# Altium PCB PCBVer4.PcbDoc
Units mm, origin at the board's own origin, x right, y up, seen from the top; angles counter-clockwise.
Board outline 40 x 13 mm, 6 copper layers (Top Signal Layer, GND_1, PWR, Mid Signal Layer, GND_2, Bottom Signal Layer), stack 1.244 mm thick; 68 components, 58 nets, 322 pads, 77 vias.
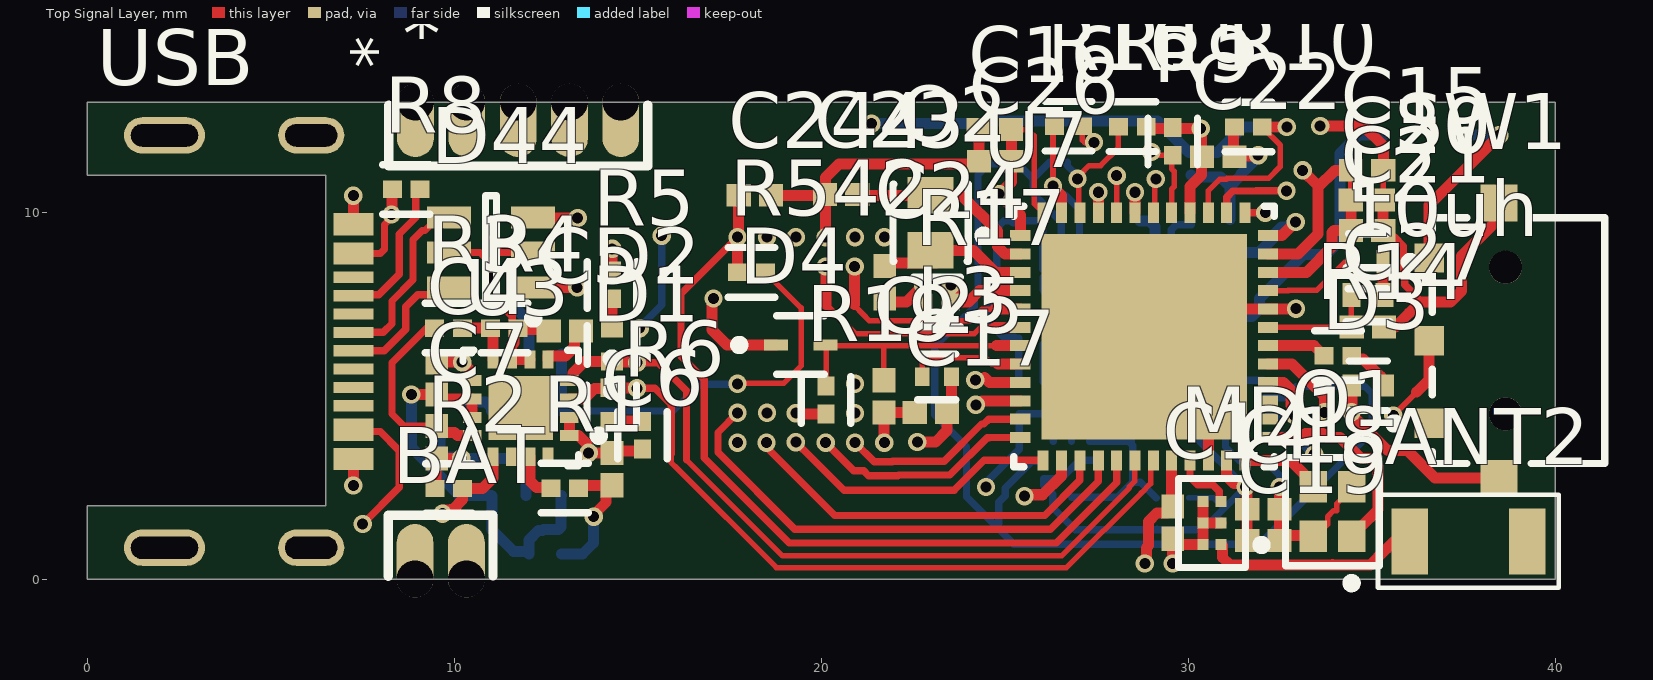
[diagram p0: Top Signal Layer view]
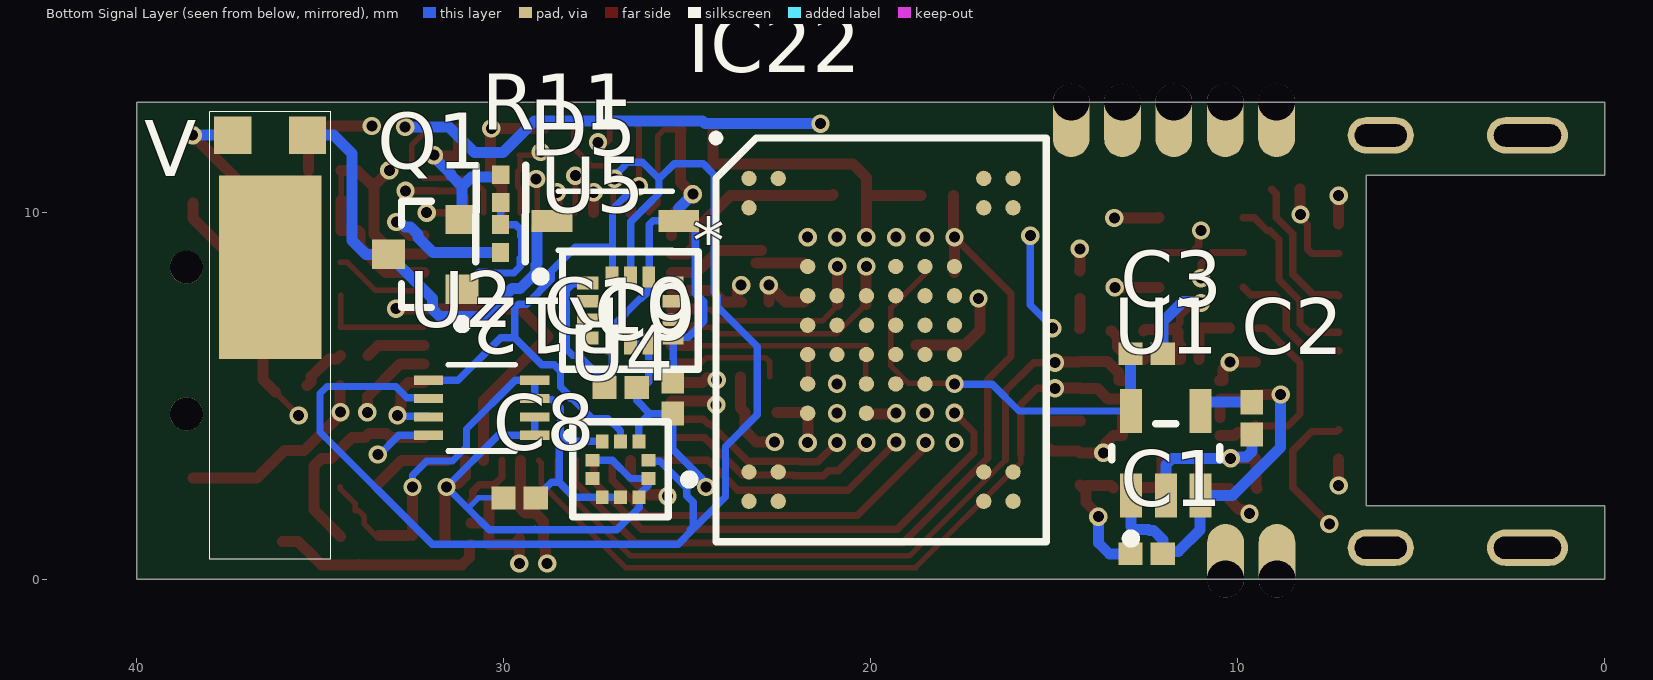
[diagram p1: Bottom Signal Layer view, seen from below]
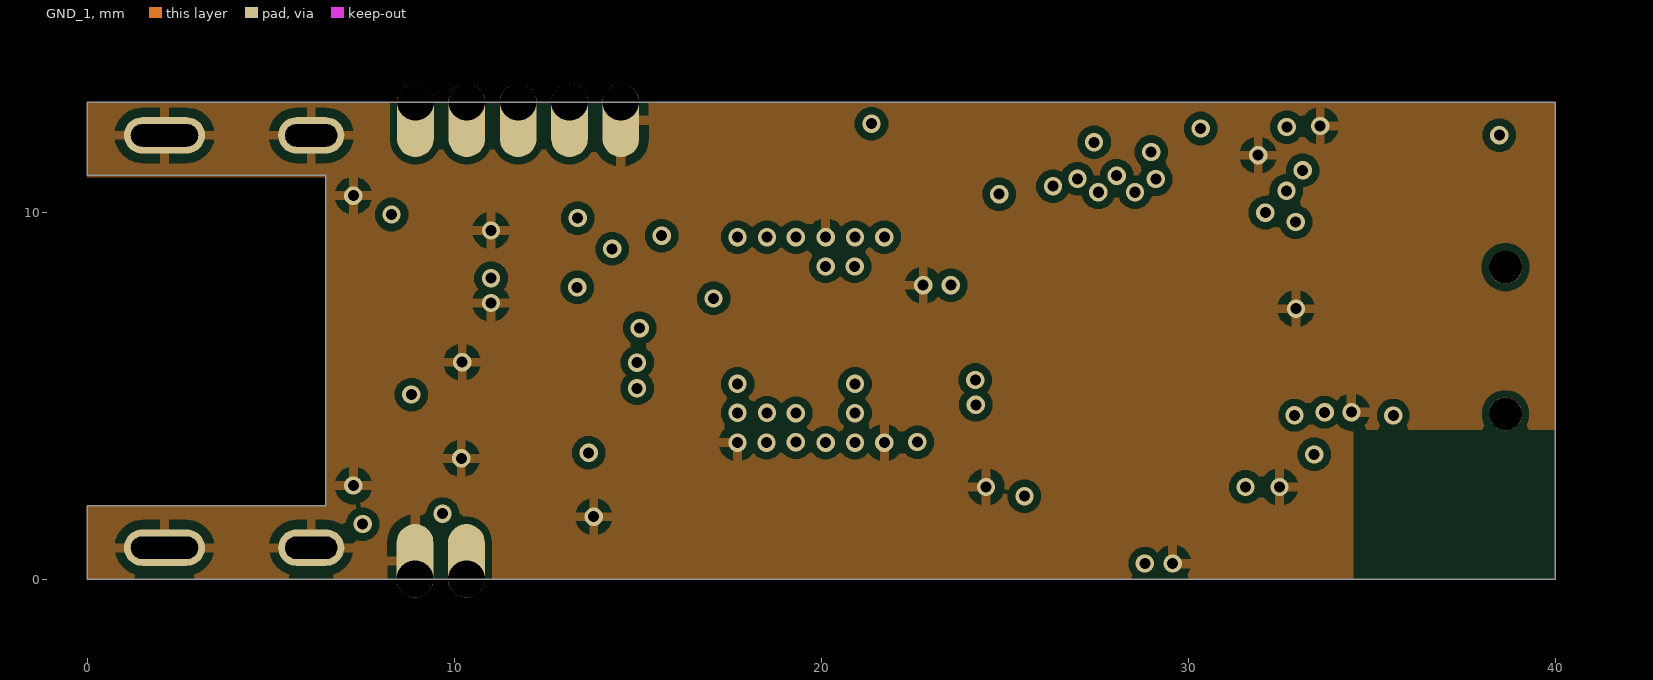
[diagram p2: GND_1]
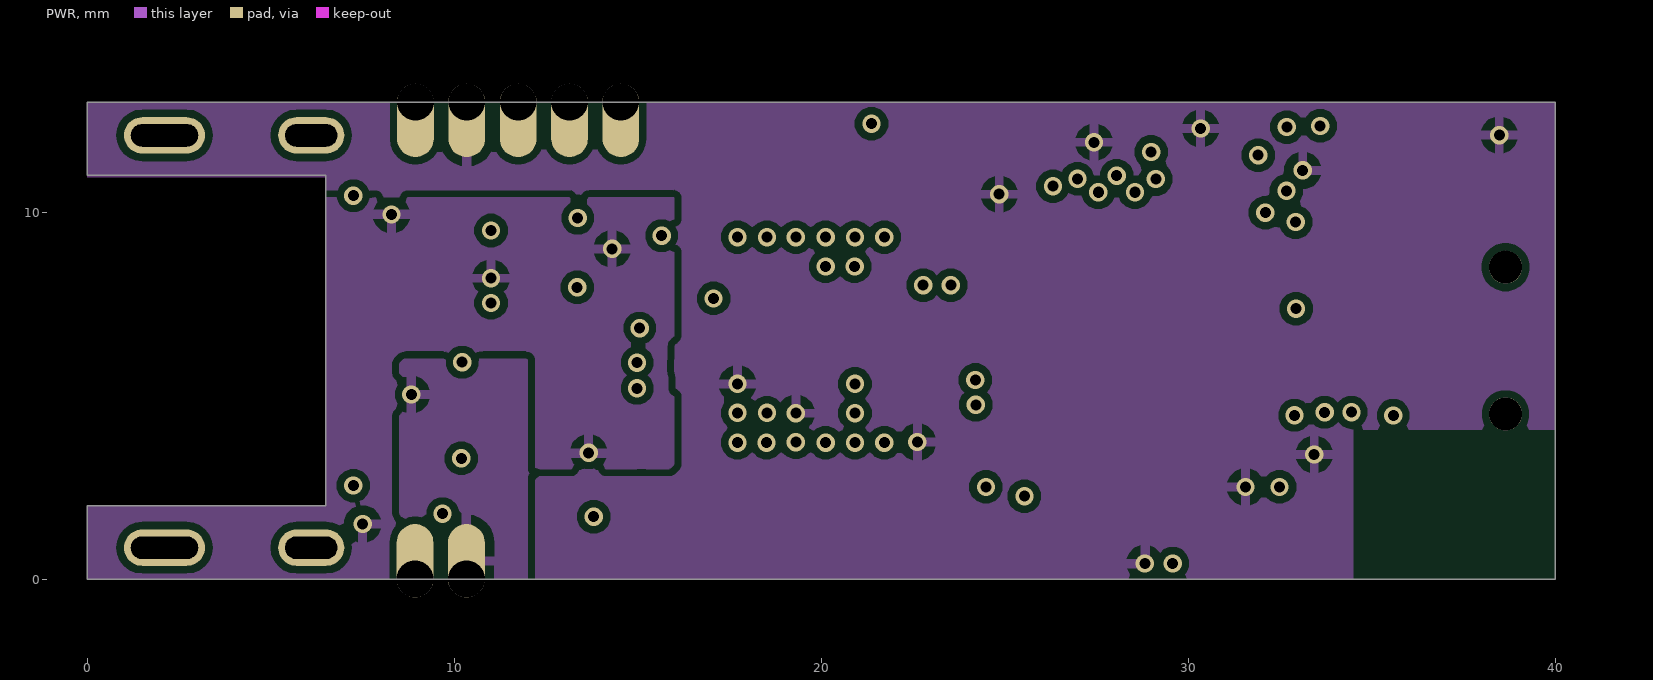
[diagram p3: PWR]
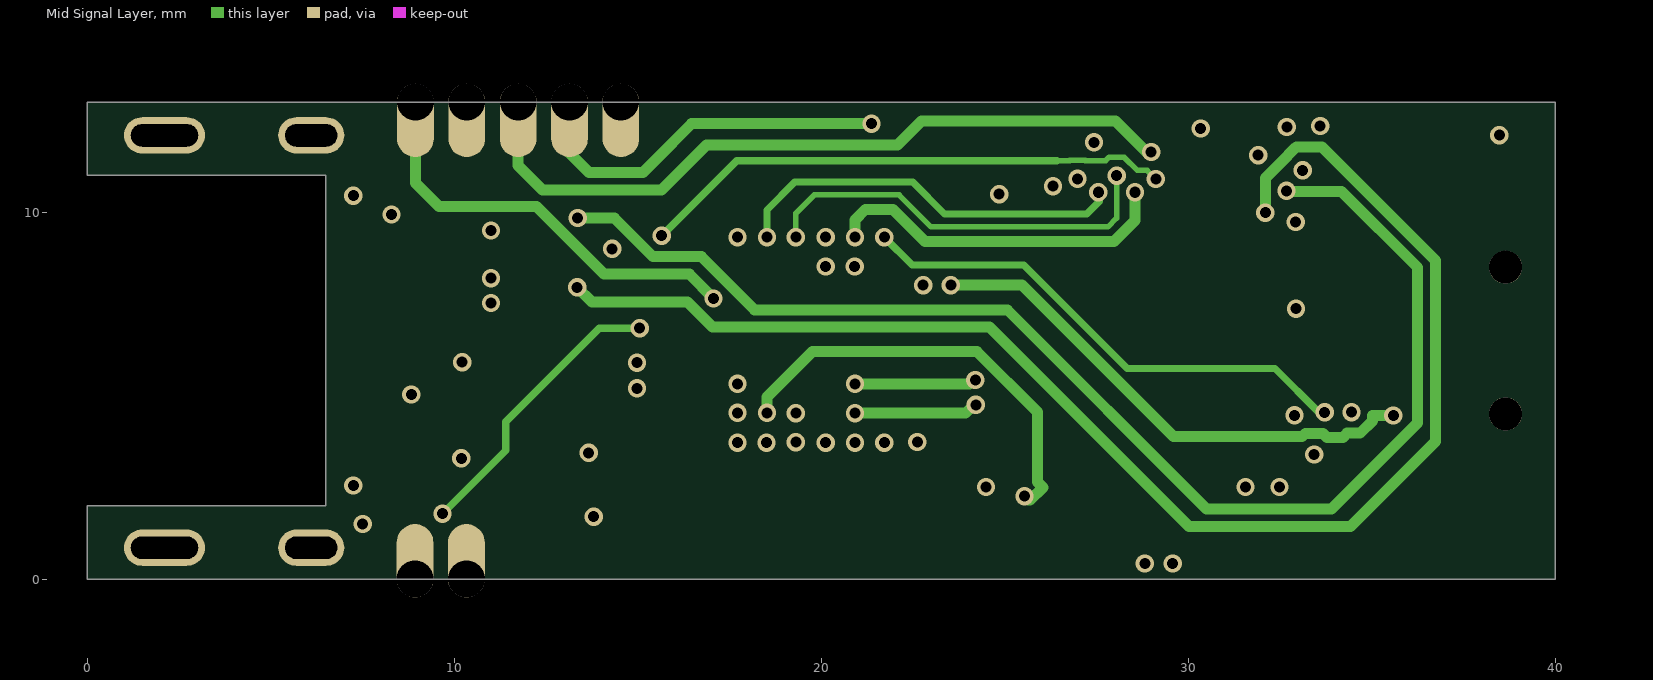
[diagram p4: Mid Signal Layer]
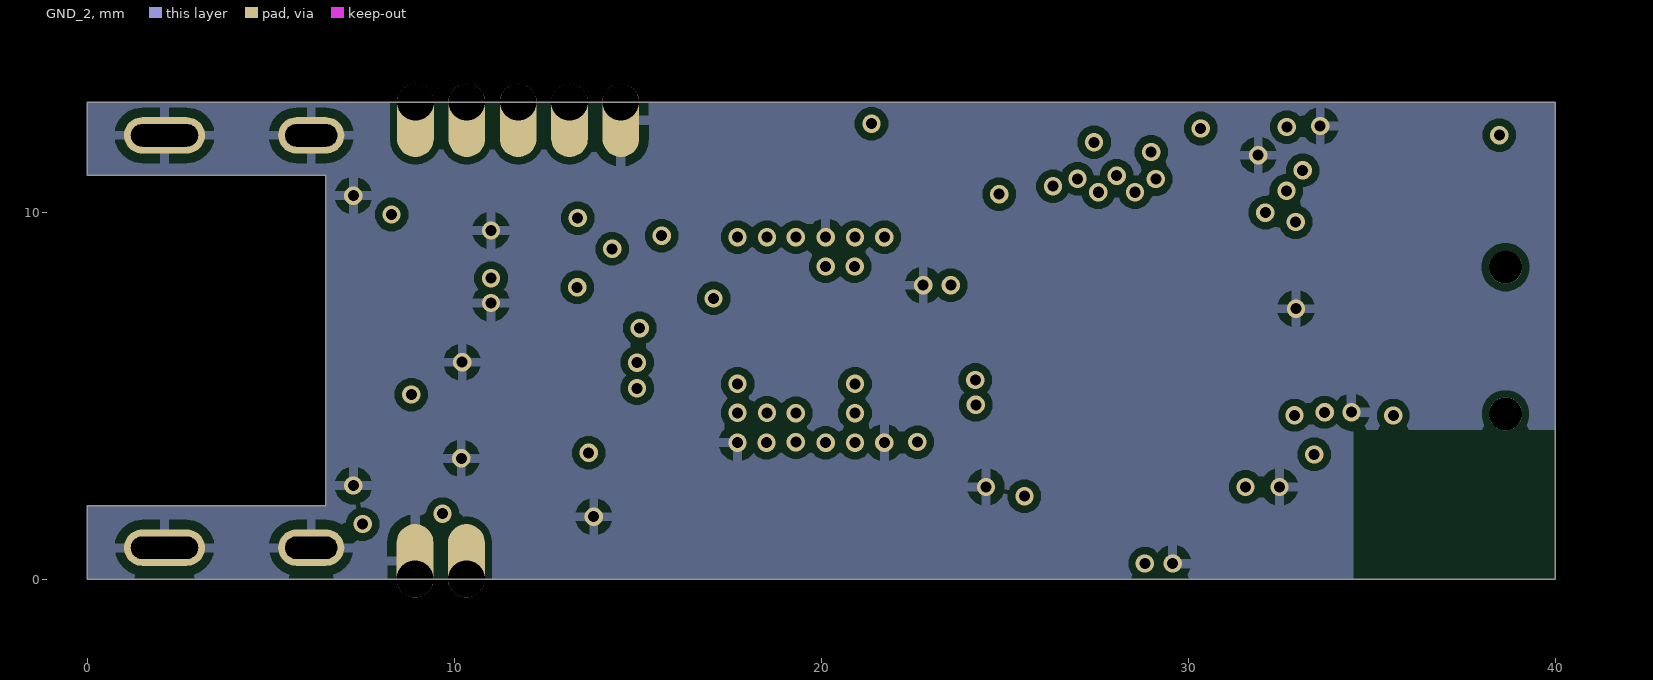
[diagram p5: GND_2]
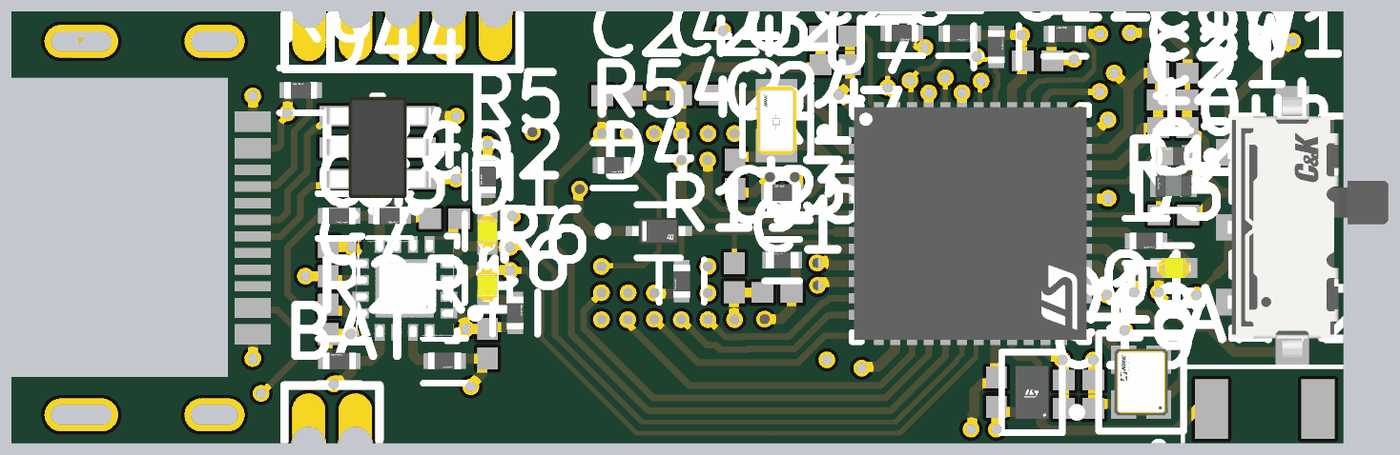
[diagram p6: 3D render of the assembled board from above, using the file's embedded part models]

## Layer stack, top to bottom
Top Solder: solder mask 0.0102, Solder Resist, Dk 3.5
Top Signal Layer: signal copper 0.018
Dielectric 2: prepreg 0.125, PP-006, Dk 4.1
GND_1: signal copper 0.035
Dielectric 4: prepreg 0.0711, PP-006, Dk 4.1
PWR: signal copper 0.018
Dielectric 1: dielectric 0.71, FR-4, Dk 4.8
Mid Signal Layer: signal copper 0.018
Dielectric 5: prepreg 0.0711, PP-006, Dk 4.1
GND_2: signal copper 0.035
Dielectric 3: prepreg 0.125, PP-006, Dk 4.1
Bottom Signal Layer: signal copper 0.018
Bottom Solder: solder mask 0.0102, Solder Resist, Dk 3.5

## Board outline
0,11 6.5,11 6.5,2 0,2 0,0 40,0 40,13 0,13

## Design rules (kind name [scope] priority, off if disabled: settings)
Clearance [All] p1: gap=0.2 ignorepadtopadclearanceinfootprint=FALSE except(0.175: Arc-Arc Arc-Track Arc-Via Arc-Hole Track-Track Track-Via Track-Hole Via-Via Via-Hole)
PolygonConnect [All] p1: connectstyle=Relief reliefconductorwidth=0.254 reliefentries=4 polygonreliefangle="90 Angle" airgapwidth=0.254
RoutingVias [All] p1: holewidth=0.3 width=0.5 viastyle="Through Hole" minholewidth=0.3 minwidth=0.5 maxholewidth=0.3 maxwidth=0.5
SolderMaskExpansion [All] p1: expansion=0.102 istentingtop=FALSE
Width [All] p1: maxlimit=0.3 minlimit=0.15 preferedwidth=0.2 minimp=50.000000 maximp=50.000000 favimp=50.000000
30 further rules are at their usual default settings.

## Classes and differential pairs
component class U_VIBRO: D5 Q1 R11 R12 V
component class U_USB: D44 R8 USB
component class U_TC58BVG1S3HBAI4: C244 IC22 R542
component class U_SWD: * R9 R10
component class U_STM32WB55CGU6: 10uh ANT2 C14 C15 C16 C17 C18 C19 C20 C21 C22 C23 C24 C25 C26 C27 D3 D4 L2 L3 MD1 O1 O2 R14 R15 R16 R17 R19 SW1 U7
component class U_M24512-DFMC6TG: U2
component class U_LSM6DSRXTR: C9 C10 U5
component class U_LPS22HBTR: C8 U4
component class U_LD3985M33R: C1 C2 C3 U1
component class U_L6924D013TR: BAT C4 C5 C6 C7 D1 D2 R1 R2 R3 R4 R5 R6 U3

## Components (designator, comment, footprint, x,y, rotation, side; value= is the part's Value field where it differs from the comment)
10uh "L1" FP-LQW15DN_00-MFG 34.9,7.74 r180 top
* "SWD" PCBComponent_1 15.54,9 r180 top
ANT2 "KH3216-A55" KH3216-A55 37.69,1.03 r270 top
BAT "BAT-CON" BAT-CON 9.653,0.568 r0 top
C1 "10 uF" CAPC1005X55X25NL05T10 12.48,0.69 r180 bottom
C2 "10 nF" CAPC1005X55X25NL05T10 9.62,4.38 r90 bottom
C3 "1 uF" CAPC1005X55X25NL05T10 12.48,6.14 r0 bottom
C4 "1 uF" CAPC1005X55X25NL05T10 9.52,5.47 r270 top
C5 "330 pF" CAPC1005X55X25NL05T10 13.011,6.76 r180 top
C6 "1 uF" CAPC1005X55X25NL05T10 14.3,3 r270 top
C7 "1 uF" CAPC1005X55X25NL05T10 9.52,3.73 r90 top
C8 "4.7 uF" CAPC1005X55X25NL05T10 29.57,2.21 r0 bottom
C9 "100 nF" CAPC1005X55X25NL05T10 26.82,5.22 r0 bottom
C10 "100 nF" CAPC1005X55X25NL05T10 25.4,4.95 r90 bottom
C14 "100 nF" CAPC1005X55X25NL05T10 29.58,1.54 r270 top
C15 "100 nF" CAPC1005X55X25NL05T10 34.88,11.14 r180 top
C16 "100 nF" CAPC1005X55X25NL05T10 24.73,12.25 r180 top
C17 "100 nF" CAPC1005X55X25NL05T10 22.99,4.54 r0 top
C18 "100 nF" CAPC1005X55X25NL05T10 32.05,1.9 r0 top
C19 "100 pF" CAPC1005X55X25NL05T10 32.05,1.05 r180 top
C20 "4.7 uF" CAPC1005X55X25NL05T10 34.87,10.33 r180 top
C21 "100 nF" CAPC1005X55X25NL05T10 34.88,9.5 r0 top
C22 "100 nF" CAPC1005X55X25NL05T10 30.82,11.51 r180 top
C23 "4.3 pF" CAPC1005X55X25NL05T10 20.54,10.48 r180 top
C24 "4.3 pF" CAPC1005X55X25NL05T10 21.73,8.09 r90 top
C25 "100 nF" CAPC1005X55X25NL05T10 21.71,4.98 r90 top
C26 "100 nF" CAPC1005X55X25NL05T10 24.74,11.39 r0 top
C27 "4.7 uF" CAPC1005X55X25NL05T10 34.9,6.87 r0 top
C244 "?nf" CAPC1005X55X25NL05T10 18.19,10.46 r180 top
D1 "LED" FP-SML-P11MTT86-MFG 14.29,4.76 r270 top
D2 "LED" FP-SML-P11MTT86-MFG 14.3,6.38 r90 top
D3 "LED" FP-SML-P11MTT86-MFG 34.91,5.27 r0 top
D4 "BAT54KFILM" FP-SOD-523-MFG 19.44,6.38 r0 top value=7pF
D5 "BAT43W-7-F" BAT43W-7-F 26.91,9.79 r0 bottom
D44 "USBLC6-2SC6" STM-SOT23-6L_V 11,8.9 r180 top
IC22 "TC58BVG1S3HBAI4" BGA63C80P10X12_900X1100X100 19.72,6.52 r180 bottom
L2 "10nh" FP-LQG15WH_02-MFG 34.89,8.64 r180 top
L3 "FBH1005-601Y" FP-BLM15-0_05-MFG 23.15,5.51 r180 top
MD1 "MLPF-WB55-01E3" FP-MLPF-WB55-01E3-MFG 30.65,1.53 r180 top
O1 "NX2016SA-32MHZ" FP-NX2016SA-MFG 33.93,1.84 r90 top
O2 "NX2012SA-32.768K" FP-NX2012SA-MFG 22.98,9.71 r270 top
Q1 "DMG3420U-7" DIOD-SOT23-3_B_V 32.14,8.85 r0 bottom
R1 "130 Kohm" FP-RC1005-IPC_C 13.01,2.48 r0 top
R2 "3.3 Kohm" FP-RC1005-IPC_C 9.85,2.47 r180 top
R3 "1 Kohm" FP-RC1005-IPC_C 9.841,6.84 r0 top
R4 "470 ohm" FP-RC1005-IPC_C 11.361,6.84 r0 top
R5 "680 Om" FP-RC1005-IPC_C 14.3,8.02 r270 top
R6 "680 Om" FP-RC1005-IPC_C 15.13,3.92 r90 top
R8 "5.3 Kohm" FP-RC1005-IPC_C 8.69,10.62 r180 top
R9 "10 Kohm" FP-RC1005-IPC_C 29.58,11.93 r90 top
R10 "10 Kohm" FP-RC1005-IPC_C 31.64,12.32 r180 top
R11 "100 Kohm" FP-RC1005-IPC_C 30.08,10.64 r90 bottom
R12 "100 ohm" FP-RC1005-IPC_C 30.09,9.28 r270 bottom
R14 "0 ohm" FP-RC1005-IPC_C 34.08,6.09 r0 top
R15 "1.8 Kohm" FP-RC1005-IPC_C 28.48,12.33 r0 top
R16 "1.8 Kohm" FP-RC1005-IPC_C 26.74,12.34 r0 top
R17 "10Kohm" FP-RC1005-IPC_C 23.15,7.55 r180 top
R19 "100 Kohm" FP-RC1005-IPC_C 20.13,4.88 r270 top
R542 "? Kohm" FP-RC1005-IPC_C 18.1,8.36 r0 top
SW1 "JS102000SAQN" FP-JS102000SAQN-MFG 39,6.5 r90 top
U1 "LD3985M33R" FP-SOT23-5L-7049676-MFG 11.96,3.43 r90 bottom
U2 "M24512-DFMC6TG" M24512-DFMC6TG 30.63,4.77 r0 bottom
U3 "L6924D013TR" FP-VFQFPN16-7185330-MFG 11.81,4.66 r180 top
U4 "LPS22HBTR" FP-HLGA-10L-8479831-0 26.82,2.99 r0 bottom
U5 "LSM6DSRXTR" FP-LGA-14L-DM00249496-MFG 26.55,7.32 r180 bottom
U7 "STM32WB55CGU6" FP-STM32WB55CGU6-MFG 28.8,6.61 r0 top
USB "USB4510-03-1-A" USB4510-03-1-A 3.3,6.5 r270 top
V "VIBRO" VIBRO 36.37,12.1 r180 bottom

## Footprints (in the part's own frame and the unit in brackets; to place one, negate y for a bottom-side part, rotate by r counter-clockwise, add the part's x,y. Pads: shape width x height; smd on the part's side, far side on the other; paste and mask are expansions set on the pad)
BAT43W-7-F [mil]
  rect 43.75x23.65 smd paste+0 mask+0: 1(-65.91,1) 2(69.91,1)
  silkscreen extent -59,-31 63,33
BAT-CON [mm]
  oval 1x2 hole 1 copper offset 0,0.5: 1(-0.723,-0.568) 2(0.677,-0.568)
  silkscreen extent -1.45,-0.49 1.4,1.17
BGA63C80P10X12_900X1100X100 [mm]
  round 0.418 smd: A1(-3.6,4.4) A2(-2.8,4.4) A9(2.8,4.4) A10(3.6,4.4) B1(-3.6,3.6) B9(2.8,3.6) B10(3.6,3.6) C3(-2,2.8) C4(-1.2,2.8) C5(-0.4,2.8) C6(0.4,2.8) C7(1.2,2.8) C8(2,2.8) D3(-2,2) D4(-1.2,2) D5(-0.4,2) D6(0.4,2) D7(1.2,2) D8(2,2) E3(-2,1.2) E4(-1.2,1.2) E5(-0.4,1.2) E6(0.4,1.2) E7(1.2,1.2) E8(2,1.2) F3(-2,0.4) F4(-1.2,0.4) F5(-0.4,0.4) F6(0.4,0.4) F7(1.2,0.4) F8(2,0.4) G3(-2,-0.4) G4(-1.2,-0.4) G5(-0.4,-0.4) G6(0.4,-0.4) G7(1.2,-0.4) G8(2,-0.4) H3(-2,-1.2) H4(-1.2,-1.2) H5(-0.4,-1.2) H6(0.4,-1.2) H7(1.2,-1.2) H8(2,-1.2) J3(-2,-2) J4(-1.2,-2) J5(-0.4,-2) J6(0.4,-2) J7(1.2,-2) J8(2,-2) K3(-2,-2.8) K4(-1.2,-2.8) K5(-0.4,-2.8) K6(0.4,-2.8) K7(1.2,-2.8) K8(2,-2.8) L1(-3.6,-3.6) L2(-2.8,-3.6) L9(2.8,-3.6) L10(3.6,-3.6) M1(-3.6,-4.4) M2(-2.8,-4.4) M9(2.8,-4.4) M10(3.6,-4.4)
  silkscreen extent -4.6,-5.5 4.5,5.6, body extent -4.5,-5.5 4.5,5.5, height 1
CAPC1005X55X25NL05T10 [mm] "Chip Capacitor, 2-Leads, Body 1.00x0.50mm, IPC Medium Density"
  rect 0.66x0.62 smd: 1(-0.44,0) 2(0.44,0)
  body extent -0.53,-0.28 0.53,0.27, height 0.55
DIOD-SOT23-3_B_V [mm] "SOT23, 3-Leads, Body 2.9x1.3mm, Pitch 0.95mm"
  rect 0.9x0.8 smd: 1(-1,0.95) 2(-1,-0.95) 3(1,0)
  silkscreen extent -1.12,-1.45 0.65,2.02, body extent -0.65,-1.45 0.65,1.45, height 1.17
FP-BLM15-0_05-MFG [mm]
  rect 0.4x0.5 smd paste+0 mask+0: 1(-0.4,0) 2(0.4,0)
  silkscreen extent -0.53,-0.63 0.52,0.63, body extent -0.7,-0.38 0.7,0.38, height 0.25
FP-HLGA-10L-8479831-0 [mm]
  rect 0.375x0.35 smd paste+0 mask+0: 1(-0.763,0.25) 2(-0.763,-0.25) 6(0.763,-0.25) 7(0.763,0.25)
  rect 0.35x0.375 smd paste+0 mask+0: 3(-0.5,-0.763) 4(0,-0.763) 5(0.5,-0.763) 8(0.5,0.763) 9(0,0.763) 10(-0.5,0.763)
  silkscreen extent -2,-1.3 1.3,1.3, body extent -1,-1 1,1, height 0.8
FP-JS102000SAQN-MFG [mm]
  rect 0.8x0.8 smd paste+0 mask+0: 1(-2.25,2.43) 2(0,2.43) 3(2.25,2.43)
  rect 1x1 smd paste+0 mask+0: 4(-3.75,0.53) 5(3.75,0.53)
  round 0.9 hole 0.9 unplated paste-2539.97 mask+0: ""(-2,0.35) ""(2,0.35)
  silkscreen extent -3.35,-2.35 3.35,3.5, body extent -4.35,-2.45 4.35,2.93, height 0.25
FP-LGA-14L-DM00249496-MFG [mm]
  rect 0.575x0.35 smd paste-1000 mask+0: 1(-1.162,0.75) 2(-1.162,0.25) 3(-1.162,-0.25) 4(-1.162,-0.75) 8(1.162,-0.75) 9(1.162,-0.25) 10(1.162,0.25) 11(1.162,0.75)
  rect 0.35x0.575 smd paste-1000 mask+0: 5(-0.5,-0.913) 6(0,-0.913) 7(0.5,-0.913) 12(0.5,0.913) 13(0,0.913) 14(-0.5,0.913)
  silkscreen extent -2.58,-1.6 1.85,1.6, body extent -1.5,-1.25 1.5,1.25, height 0.86
FP-LQG15WH_02-MFG [mm]
  rect 0.35x0.65 smd paste+0 mask+0: 1(-0.425,0) 2(0.425,0)
  silkscreen extent -1.28,-0.78 0.53,0.72, body extent -0.7,-0.43 0.7,0.43, height 0.25
FP-LQW15DN_00-MFG [mm]
  rect 0.5x0.66 smd paste+0 mask+0: 1(-0.45,0) 2(0.45,0)
  silkscreen extent -0.6,-0.74 0.6,0.72, body extent -0.8,-0.48 0.8,0.48, height 0.25
FP-MLPF-WB55-01E3-MFG [mm]
  rect 0.3x0.3 smd paste-1000 mask-1000: A1(-0.25,0.587) A2(-0.25,0) A3(-0.25,-0.587) B1(0.25,0.587) B2(0.25,0) B3(0.25,-0.587)
  silkscreen extent -1.48,-1.21 0.91,1.21, body extent -1.01,-1.31 1.01,1.31, height 0.25
FP-NX2012SA-MFG [mm]
  rect 1x1.25 smd paste+0 mask+0: 1(-0.75,0) 2(0.75,0)
  silkscreen extent -1.05,-1.02 1.05,1.02, body extent -1.35,-0.72 1.35,0.72, height 0.25
FP-NX2016SA-MFG [mm]
  rect 0.85x0.75 smd paste+0 mask+0: 1(-0.675,-0.525) 2(0.675,-0.525) 3(0.675,0.525) 4(-0.675,0.525)
  silkscreen extent -2.07,-1.28 1.48,1.28, body extent -1.2,-1 1.2,1, height 0.25
FP-RC1005-IPC_C [mm]
  rect 0.515x0.472 smd paste+0 mask+0: 1(-0.379,0) 2(0.379,0)
  silkscreen extent -0.64,-0.67 0.64,0.67, body extent -0.74,-0.38 0.74,0.38, height 0.25
FP-SML-P11MTT86-MFG [mm]
  rect 0.5x0.6 smd paste+0 mask+0: 1(-0.45,0) 2(0.45,0)
  silkscreen extent -1.37,-0.67 0.53,0.67, body extent -0.8,-0.43 0.8,0.43, height 0.25
FP-SOD-523-MFG [mm]
  rect 0.65x0.3 smd paste+0 mask+0: 1(-0.675,0) 2(0.675,0)
  silkscreen extent -1.8,-0.8 0.65,0.8, body extent -1.1,-0.55 1.1,0.55, height 0.25
FP-SOT23-5L-7049676-MFG [mm]
  rect 1.2x0.6 smd paste+0 mask+0: 1(-1.15,0.95) 2(-1.15,0) 3(-1.15,-0.95) 4(1.15,-0.95) 5(1.15,0.95)
  silkscreen extent -2.45,-1.48 0.8,1.47, body extent -0.87,-1.5 0.87,1.5, height 1.45
FP-STM32WB55CGU6-MFG [mm]
  rect 0.55x0.3 smd paste+0 mask+0: 1(-3.375,2.75) 2(-3.375,2.25) 3(-3.375,1.75) 4(-3.375,1.25) 5(-3.375,0.75) 6(-3.375,0.25) 7(-3.375,-0.25) 8(-3.375,-0.75) 9(-3.375,-1.25) 10(-3.375,-1.75) 11(-3.375,-2.25) 12(-3.375,-2.75) 25(3.375,-2.75) 26(3.375,-2.25) 27(3.375,-1.75) 28(3.375,-1.25) 29(3.375,-0.75) 30(3.375,-0.25) 31(3.375,0.25) 32(3.375,0.75) 33(3.375,1.25) 34(3.375,1.75) 35(3.375,2.25) 36(3.375,2.75)
  rect 0.3x0.55 smd paste+0 mask+0: 13(-2.75,-3.375) 14(-2.25,-3.375) 15(-1.75,-3.375) 16(-1.25,-3.375) 17(-0.75,-3.375) 18(-0.25,-3.375) 19(0.25,-3.375) 20(0.75,-3.375) 21(1.25,-3.375) 22(1.75,-3.375) 23(2.25,-3.375) 24(2.75,-3.375) 37(2.75,3.375) 38(2.25,3.375) 39(1.75,3.375) 40(1.25,3.375) 41(0.75,3.375) 42(0.25,3.375) 43(-0.25,3.375) 44(-0.75,3.375) 45(-1.25,3.375) 46(-1.75,3.375) 47(-2.25,3.375) 48(-2.75,3.375)
  rect 5.6x5.6 smd paste+0 mask+0: 49(0,0)
  silkscreen extent -4.5,-3.55 3.55,3.55, body extent -3.75,-3.75 3.75,3.75, height 0.25
FP-VFQFPN16-7185330-MFG [mm]
  rect 0.5x0.3 smd paste+0 mask+0: 1(-1.325,0.75) 2(-1.325,0.25) 3(-1.325,-0.25) 4(-1.325,-0.75) 9(1.325,-0.75) 10(1.325,-0.25) 11(1.325,0.25) 12(1.325,0.75)
  rect 0.3x0.5 smd paste+0 mask+0: 5(-0.75,-1.325) 6(-0.25,-1.325) 7(0.25,-1.325) 8(0.75,-1.325) 13(0.75,1.325) 14(0.25,1.325) 15(-0.25,1.325) 16(-0.75,1.325)
  rect 1.75x1.75 smd paste+0 mask+0: 17(0,0)
  silkscreen extent -2.25,-1.58 1.58,1.58, body extent -1.68,-1.68 1.68,1.68, height 0.25
KH3216-A55 [mm]
  rect 1.8x1 smd: 1(0,-1.651) 2(0,1.549)
  silkscreen extent -1.27,-2.51 1.27,2.41
M24512-DFMC6TG [mm]
  rect 0.8x0.25 smd paste+0 mask+0: 1(-1.475,0.852) 2(-1.475,0.352) 3(-1.475,-0.149) 4(-1.475,-0.649) 5(1.424,-0.649) 6(1.424,-0.149) 7(1.424,0.352) 8(1.424,0.852)
  silkscreen extent -2.53,-1.08 0.88,1.28
PCBComponent_1 [mm]
  oval 1x2 hole 1 copper offset 0,0.5: 1(1,-4) 2(2.4,-4) 3(3.8,-4) 4(5.2,-4) 5(6.6,-4)
  silkscreen extent 0.27,-3.92 7.33,-2.26
STM-SOT23-6L_V [mm] "SOT23, 6-Leads, Body 3.05x1.75mm, Pitch 0.95mm"
  rect 1.2x0.6 smd: 1(-1.15,0.95) 2(-1.15,0) 3(-1.15,-0.95) 4(1.15,-0.95) 5(1.15,0) 6(1.15,0.95)
  silkscreen extent -1.28,-1.55 0.15,1.92, body extent -1.6,-1.53 1.6,1.53, height 1.45
USB4510-03-1-A [mil]
  rect 24x43 smd paste+0 mask+0: A1-B12(-125,155.5) A4-B9(-93.5,155.5) B1-A12(127,155.5) B4-A9(95.5,155.5)
  rect 12x43 smd paste+0 mask+0: A5(-48.2,155.5) A6(-8.8,155.5) A7(10.9,155.5) A8(50.3,155.5) B5(70,155.5) B6(30.6,155.5) B7(-28.5,155.5) B8(-68,155.5)
  oval 39x71 hole 24 slot 56 at 90 deg: GND(-220.25,110.25) GND(222.25,110.25)
  oval 39x87 hole 24 slot 72 at 90 deg: GND(-220.25,-47.2) GND(222.25,-47.2)
VIBRO [mil]
  rect 40x40 smd mask+1: 1(40,0) 2(-40,0)
  rect 110.24x196.85 smd: 3(0,-141.73)
  silkscreen extent -65,-455 65,25

## Part data
10uh: library part CMP-06042-016523-1, "FIXED IND 10UH 120MA 5.405OHM", RoHS Compliant=Yes
C1 C2 C3 C4 C5 C6 C7 C8 C9 C10 C14 C15 C16 C17 C18 C19 C20 C21 C22 C23 C24 C25 C26 C27 C244: library part CMP-2008-04515-1, Manufacturer=Murata, Part Number=GRM155F50J684ZE01D
D1 D2 D3: library part CMP-2000-07126-2, "LED YELLOW/GREEN CLEAR 1006 SMD", Case Code (Imperial)=0402, Case Code (Metric)=1005, Color=Green, Forward Current=20mA, Forward Voltage=1.9V, Lens Color=Colorless, Max Operating Temperature=85°C, Min Operating Temperature=-40°C, Package Quantity=1, Power Rating=54mW, Test Current=1mA, Case/Package=0402, Dominant Wavelength=569nm, Height=0.25mm, Illumination Color=Green, Lead Free="Lead Free", Length=1mm, Lens Style=Diffused, Lens Transparency=Clear, Luminous Intensity=2.1mcd, Mount="Surface Mount", Number of LEDs=1, Number of Pins=2, Packaging="Tape and Reel", Radiation Hardening=No, REACH SVHC="No SVHC", RoHS Compliant=Yes, Series=PicoLED™, Viewing Angle=150°, Wavelength=569nm, Width=0.6mm
D4: library part CMP-12187-000026-1, "DIODE SCHOTTKY 40V 300MA SOD523", Capacitance=7pF, Forward Current=300mA, Manufacturer=STMicroelectronics, Max Junction Temp=+150°C, Max Repetitive Reverse Voltage=40V, Max Surge Forward Current=1.25A, Package=SOD-523, Peak Reverse Current=1uA, Temperature="-40°C to +150°C", Temperature Range Low=-40°C, Automotive=No, Category=Diode, ComponentLink2Description=Datasheet, ComponentLink2URL=https://www.st.com/content/ccc/resource/technical/document/datasheet/07/50/54/f2/0d/ba/4a/79/CD00001322.pdf/files/CD00001322.pdf/jcr:content/translations/en.CD00001322.pdf, Device Class L1="Discrete Semiconductors", Device Class L2=Diodes, Device Class L3="Schottky Diodes", Digikey Description="DIODE SCHOTTKY 40V 300MA SOD523", Height=0.7mm, Lead Free=Yes, Manufacturer Part Number=BAT54KFILM, Mouser Description="Schottky Diodes & Rectifiers schottky diode", Octopart=https://octopart.com/bat54kfilm-stmicroelectronics-39618022, RoHS=TRUE, Temperature Range High=+150°C
D44: library part CMP-2000-05378-1, "Very low capacitance ESD protection, 3.5 pF, -40 to 125 degC, 6-Pin SOT23, RoHS, Tape and Reel", Capacitance Value=3.5pF, Clamping Voltage=17V, Leakage Current=0.15uA, Manufacturer=STMicroelectronics, Operating Temp Range=-40Cto125C, Operating Temperature Classification=Automotive, Operating Temperature Max Deg. C=125C, Operating Temperature Min Deg. C=-40C, Package / Case=SOT-23, Package Description="6-Pin Small Outline Transistor, Body 2.925 x 1.625 mm, Pitch 0.95 mm", Package Reference=SOT23-6L, Peak Pulse Current=5A, Reverse Breakdown Voltage=6V, Reverse Stand-off Voltage=5V, Test Current (It)=1mA, Clamping Voltage (Max)=17V, Configuration=Dual, Datasheet URL=http://www.st.com/st-web-ui/static/active/en/resource/technical/document/datasheet/CD00050750.pdf, Datasheet Version="Rev. 5, 10/2011", Direction Type=Uni-Directional, Leakage Current (Max)=0.15uA, Manufacturer URL=http://www.st.com/, Mounting=SurfaceMount, Mounting Style=SurfaceMount, Number of Elements=1, Packaging=TapeandReel, Pin Count=6, Polarity=Uni-Directional, Product Depth (mm)=1.75mm, Product Height (mm)=1.3mm, Product Length (mm)=3.05mm, Rad Hardened=No, Suppressor Type=DiodeArrays, Working Voltage=5V, Working Voltage (Max)=5V
IC22: "Integrated Circuit", Manufacturer_Name=Toshiba, Mouser Part Number=757-TC58BVG1S3HBAI4, Datasheet Link=https://media.digikey.com/pdf/Data%20Sheets/Toshiba%20PDFs/KIOXIA_TC58BVG1S3HBAI4_REV2.00_E20191001C.pdf, Height=1mm, Manufacturer_Part_Number=TC58BVG1S3HBAI4, Mouser Price/Stock=https://www.mouser.com/Search/Refine.aspx?Keyword=757-TC58BVG1S3HBAI4
L2: library part CMP-06042-005237-1, "Multilayer type Inductor for Automotive 10nH ±5% 0.19Ω 500mA 0402", Case Code (Imperial)=0402, Case Code (Metric)=1005, Current Rating=500mA, DC Resistance (DCR)=190mR, Inductance=10nH, Max Operating Temperature=125°C, Min Operating Temperature=-55°C, Ratings=AEC-Q200, Self Resonant Frequency=3.3GHz, Test Frequency=100MHz, Tolerance=5%, Case/Package=0402, Core Material=Air, Mount="Surface Mount", Packaging="Cut Tape", Shielding=Unshielded
L3: library part CMP-0686-00187-4, "Chip Ferrite Bead, 0402, 600Ω @ 100MHz, 0.52Ω, 25%, 300mA", Case Code (Imperial)=0402, Case Code (Metric)=1005, Current Rating=300mA, DC Resistance (DCR)=520mR, DC Resistance-Max=600mR, Frequency=100MHz, Max Operating Temperature=125°C, Min Operating Temperature=-55°C, Package Quantity=10000, Tolerance=25%, Case/Package=0402, Core Material=Ferrite, DC Current=300mA, Depth=0.55mm, Height=0.5mm, Impedance=600R, Lead Free="Lead Free", Length=1mm, Material=Steel, Max Current Rating=300mA, Max DC Current=300mA, Military Standard=Not, Number of Circuits=1, Number of Lines=1, Number of Pins=2, Packaging="Tape and Reel", Radiation Hardening=No, REACH SVHC="No SVHC", RoHS Compliant=Yes, Series=BLM15AG_SN, Shielding=Unshielded, Termination=SMD/SMT, Test Frequency=100MHz, Width=0.5mm
MD1: library part CMP-12074-000002-1, "RF FILTER LOW PASS 2.45GHZ 6SMD"
O1: library part CMP-200220-000017-1, "CRYSTAL 32.0000MHZ 8PF SMD", Case/Package=SMD/SMT, ESR (Equivalent Series Resistance)=60R, Frequency=32MHz, Load Capacitance=8pF, Max Operating Temperature=125°C, Min Operating Temperature=-40°C, Ratings=AEC-Q200, Mount="Surface Mount", Packaging="Tape and Reel"
O2: library part CMP-200220-000019-1, "CRYSTAL 32.7680KHZ 12.5PF SMD", Case/Package=SMD/SMT, ESR (Equivalent Series Resistance)=80kR, Frequency=32.768kHz, Frequency Tolerance=20ppm, Load Capacitance=12.5pF, Max Operating Temperature=85°C, Min Operating Temperature=-40°C, Height=0.024inch, Length=0.081inch, Mount="Surface Mount", Packaging="Cut Tape", RoHS Compliant=Yes, Series=NX2012SA, Width=0.047inch
Q1: library part CMP-2000-06172-1, "N-Channel Enhancement Mode MOSFET, 20 V, -55 to 150 degC, 3-Pin SOT23, RoHS, Tape and Reel", Drain-Source On Resistance-Max=29mO, Drain-to-Source Voltage [Vdss]=20V, Manufacturer="Diodes Inc", Package Description="3-Pin Small Outline Transistor, Body 2.9 x 1.3 mm, Pitch 0.96 mm", Package Reference=SOT23-3, Rated Power Dissipation=740mW, Channel Type=N-Channel, Datasheet URL=http://www.diodes.com/_files/datasheets/ds31867.pdf, Datasheet Version="Rev. 5-2, 09/2013", Manufacturer URL=http://www.diodes.com/, Mounting Technology=SurfaceMount, Qg Gate Charge=5.4nC
R1 R2 R3 R4 R5 R6 R8 R9 R10 R11 R12 R14 R15 R16 R17 R19 R542: library part CMP-13261-000953-1, "Res Thick Film 0402 1.87kΩ 1% 0.063W ±100ppm/°C Molded SMD T/R", Case Code (Imperial)=0402, Case Code (Metric)=1005, Max Operating Temperature=155°C, Max Power Dissipation=63mW, Min Operating Temperature=-55°C, Package Quantity=1, Resistance=1.87kR, Temperature Coefficient=100ppm/°C, Tolerance=1%, Voltage Rating (DC)=50V, Case/Package=0402, Composition="Thick Film", Contact Plating=Tin, Depth=0.5mm, Features="Moisture Resistant", Height=0.016inch, Lead Free="Lead Free", Length=1mm, Military Standard=Not, Number of Terminations=2, Packaging="Tape and Reel", Power Rating=63mW, Radiation Hardening=No, Width=0.02inch
SW1: library part CMP-10038-000025-1, "SWITCH SLIDE SPDT 1MA 5V", Actuator Color=Black, Case/Package=SMD/SMT, Contact Current Rating=1mA, Contact Resistance=70mR, Flammability Rating="UL94 V-2", Max Operating Temperature=85°C, Max Voltage Rating (DC)=5V, Min Operating Temperature=-20°C, Package Quantity=1, Actuator Length=1.5mm, Actuator Material=Nylon, Actuator Type=Standard, Contact Material="Copper Alloy", Contact Plating=Silver, Current Rating=1mA, Depth=4.82mm, Electrical Life=15000Cycles, Housing Material=Nylon, Length=7.8mm, Max Current Rating=1mA, Mount="Surface Mount", Orientation="Right Angle", Packaging="Tape and Reel", Radiation Hardening=No, REACH SVHC="No SVHC", RoHS Compliant=Yes, Series=JS, Switch Function=On-On, Switch Travel=1.5mm, Termination="Gull Wing", Throw Configuration=SPDT, Voltage Rating (DC)=5V
U1: library part CMP-0244-00328-2, "IC REG LINEAR 3.3V 150MA SOT23-5", Case/Package=SOT-23, Dropout Voltage=60mV, Input Bias Current=85uA, Max Input Voltage=6V, Max Operating Temperature=125°C, Max Output Current=150mA, Min Current Limit=300mA, Min Input Voltage=2.5V, Min Operating Temperature=-40°C, Min Output Voltage=3.3V, Output Voltage Accuracy=2%, Package Quantity=1, Quiescent Current=150uA, Accuracy=2%, Height=1.3mm, Lead Free="Lead Free", Length=3mm, Mount="Surface Mount", Number of Outputs=1, Number of Pins=5, Number of Regulators=1, Output Current=150mA, Output Type=Fixed, Output Voltage=3.3V, Packaging="Tape and Reel", Polarity=Positive, Radiation Hardening=No, Width=1.75mm
U3: library part CMP-12147-000005-1, "IC BATT CHRGR ION/POLY 16-VFQFPN", Manufacturer=STMicroelectronics, Max Junction Temp=+125°C, Max Power Dissipation=0.67W, Max Supply Voltage=12V, Min Supply Voltage=2.5V, Nominal Supply Current=1.8mA, Output Current=975mA, Output Voltage=4.2V, Package=VFQFPN16-7185330, Temperature="-40°C to +125°C", Temperature Range Low=-40°C, Automotive=No, Category=IC, ComponentLink2Description=Datasheet, ComponentLink2URL=https://www.st.com/resource/en/datasheet/l6924d.pdf, Device Class L1="Integrated Circuits (ICs)", Device Class L2="Power Management ICs", Device Class L3="Battery Management", Digikey Description="IC BATT CHRGR ION/POLY 16-VFQFPN", Footprint Url=https://www.st.com/resource/en/datasheet/l6738.pdf, Height=1mm, Ipc Land Pattern Name=QFN50P300X300X90-16, Lead Free=Yes, Manufacturer Part Number=L6924D013TR, Mouser Description="Battery Management Battery Charger Sys Li-Ion/Li-Poly", Number Of Cells=1, Number of Outputs=1, Octopart=https://octopart.com/l6924d013tr-stmicroelectronics-421996, RoHS=TRUE, Standoff Height=0.02mm, Temperature Range High=+125°C
U4: library part CMP-12182-000004-1, "MEMS NANO PRESSURE SENSOR: 260-1", Manufacturer=STMicroelectronics, Max Supply Voltage=3.6V, Min Supply Voltage=1.7V, Operating Supply Current=3-12uA, Package=HLGA-10L-8479831, Temperature="-40°C to +85°C", Temperature Range High=+85°C, Temperature Range Low=-40°C, Automotive=No, Category=IC, ComponentLink2Description=Datasheet, ComponentLink2URL=https://www.st.com/resource/en/datasheet/lps22hb.pdf, Device Class L1=Sensors, Device Class L2="Pressure Sensors", Device Class L3=unset, Digikey Description="MEMS NANO PRESSURE SENSOR: 260-1", Footprint Url=https://www.st.com/content/ccc/resource/technical/document/technical_note/73/17/9c/16/dd/96/4a/01/CD00134799.pdf/files/CD00134799.pdf/jcr:content/translations/en.CD00134799.pdf, Height=0.8mm, Lead Free=Yes, Manufacturer Part Number=LPS22HBTR, Octopart=https://octopart.com/lps22hbtr-stmicroelectronics-51851131, Port Style="No Port", RoHS=TRUE, Sensor Output=I2C,SPI
U5: library part CMP-12177-000016-1, "CONSUMER MEMS", RoHS Compliant=Yes
U7: library part CMP-12105-000013-1, "ULTRA-LOW-POWER DUAL CORE ARM CO", Ambient Temperature Range High=+85°C, Ambient Temperature Range Low=-40°C, Frequency=64MHz, Manufacturer=STMicroelectronics, Max Junction Temp=+105°C, Max Supply Voltage=3.6V, Min Supply Voltage=1.71V, Package=UFQFPN48, Temperature="-40°C to +105°C", Automotive=No, Category=IC, ComponentLink2Description=Datasheet, ComponentLink2URL=https://www.st.com/resource/en/datasheet/stm32wb55cg.pdf, Core Architecture="ARM Cortex-M4", Data Bus Width=32bits, Device Class L1="Integrated Circuits (ICs)", Device Class L2="Embedded Processors and Controllers", Device Class L3=Microcontrollers, Digikey Description="ULTRA-LOW-POWER DUAL CORE ARM CO", Height=0.65mm, Interface=I2C,SPI,UART,USART,2-Wire,USB,IrDA,Other, Lead Free=Yes, Manufacturer Part Number=STM32WB55CGU6, Memory Size=1MBytes, Memory Type=FLASH, Number Of A/D Converters=1, Number Of Adc Channels=13, Number Of Cores=1, Number Of I2C Channels=2, Number Of I/Os=30, Number Of Pwm Channels=14, Number Of Spi Channels=1, Number Of Timers/Counters=6, Number Of Uart Channels=2, Number Of Usb Channels=1, Octopart=https://octopart.com/stm32wb55cgu6-stmicroelectronics-98750847, Ram Size=256KBytes, RoHS=TRUE, Standoff Height=0mm, Temperature Range High=+105°C, Temperature Range Low=-40°C

## Via types
v1: diameter 0.5, hole 0.3, Top Signal Layer to Bottom Signal Layer, 77 vias

## Nets (pads, with @x,y where several pads share a name; then routed paths per layer and width w, separated by ;. In a path a pad name is that pad's centre, name@x,y a point inside that pad or via, vN(x,y) a via of type N, cw(c..) or ccw(c..) an arc to the next point about the centre after c; other vN are vias at no path point)
+3.3: *.4 C3.2 C8.2 C9.2 C10.2 C14.1 C15.2 C16.1 C17.2 C18.1 C19.2 C20.2 C21.1 C22.2 C26.2 D5.1 IC22.H8 IC22.J6 L3.1 R9.2 R15.2 R16.2 R19.2 R542.2 SW1.3 U1.5 U2.1 U2.2 U2.8 U4.1 U4.6 U4.10 U5.1 U5.5 U5.8 U5.12 U7.1 U7.20 U7.23 U7.34 U7.35 U7.40 U7.48 V.2 | length 76.3
  Top Signal Layer w0.15: v1(17.72,5.32) 17.74,5.34 18.98,5.34 19.45,5.81 19.45,7.389 R542.2 ; C16.1 25.63,12.25 25.8,12.08 25.8,10.235 U7.48 ; R16.2 27.119,11.961 27.19,11.89 27.42,11.89 v1(27.435,11.905) ; C20.2 34.43,11.13 C15.2
  Top Signal Layer w0.3: v1(19.31,4.52) 19.329,4.501 R19.2 ; v1(22.62,3.735) 22.625,3.73 23.11,3.73 23.43,4.05 C17.2 23.55,4.66 L3.1 ; C16.1 25.18,12.24 C26.2 25.18,10.819 v1(24.851,10.49) 25.425,9.916 U7.1 ; v1(28.82,0.425) 28.858,0.463 28.858,0.847 28.92,0.909 28.92,1.575 29.145,1.8 29.42,1.8 29.58,1.96 C14.1 29.55,2.01 U7.20 ; R15.2 28.909,12.28 v1(30.34,12.28) 30.36,12.26 30.36,11.01 30.05,10.7 U7.40 ; U7.23 31.05,2.815 31.255,2.61 31.41,2.61 31.51,2.51 v1(31.564,2.51) ; C19.2 v1@31.61,2.33 ; U7.34 33.22,8.36 33.92,9.06 33.92,9.44 33.98,9.5 C21.1 34.44,10.32 C20.2 ; U7.35 32.99,8.86 33.54,9.41 33.54,10.68 ; v1(33.122,11.138) 33.54,10.72 33.54,10.68 ; C15.2 34,11.14 33.54,10.68 ; SW1.3 36.57,10.19 v1(38.48,12.1)
  Bottom Signal Layer w0.15: C8.2 30.694,2.21 30.979,1.925
  Bottom Signal Layer w0.2: U1.5 15.96,4.58 16.69,5.31 17.71,5.31 v1(17.72,5.32) ; U5.8@25.27,6.595 24.976,6.595 24.55,7.021 24.55,7.562 24.78,7.792 24.78,9.564 24.981,9.765 D5.1 25.935,9.765 26.04,9.66 U5.12@26.04,8.443 ; U5.8 25.388,5.403 C10.2 ; U5.12 26.05,7.88 26.075,7.855 26.075,7.821 26.251,7.645 26.285,7.645 27.05,6.88 U5.5 27.05,5.25 27.08,5.22 27.955,6.095 28.124,6.095 28.3,6.271 28.3,7.869 28.124,8.045 27.738,8.045 U5.1 ; U4.6 27.05,3.24 26.55,2.74 U4.1 26.057,2.56 26.31,2.307 26.31,1.95 26.92,1.34 29.13,1.34 ; 29.15,1.36 29.13,1.34 ; U2.2 U2.1 30.156,3.918 v1(31.564,2.51) 30.979,1.925 30.394,1.34 29.13,1.34 ; U2.8 32.862,3.918 33.43,3.35 33.43,3.39 v1(33.437,3.397) v1@33.483,3.35
  Bottom Signal Layer w0.3: U1.5 12.915,4.585 12.915,6.135 C3.2 ; v1(19.31,4.52) IC22.J6 ; v1(24.851,10.49) 25.236,10.105 D5.1 ; V.2 v1(38.48,12.1)
GND: *.1 BAT.1 C1.1 C2.1 C3.1 C4.1 C5.2 C6.2 C7.1 C8.1 C9.1 C10.1 C14.2 C15.1 C16.2 C17.1 C18.2 C19.1 C20.1 C21.2 C22.1 C23.2 C24.1 C25.1 C26.1 C27.2 C244.1 D3.1 D44.2 IC22.C5 IC22.K3 IC22.K8 MD1.A2 MD1.B1 MD1.B2 MD1.B3 O1.2 O1.4 Q1.2 R1.2 R2.2 R4.2 R10.2 R11.2 R17.2 SW1.4 SW1.5 U1.2 U2.3 U2.4 U3.6 U3.7 U3.9 U4.3 U4.5 U4.8 U4.9 U5.6 U5.7 U7.22 U7.32 U7.49 USB.A1-B12 USB.B1-A12 USB.GND | length 87.5
  Top Signal Layer w0.15: O1.4 33.47,1.165 33.805,1.5 33.805,1.704 33.966,1.865 34.055,1.865 34.055,2.055 34.455,2.455 O1.2 ; C20.1 35.32,10.34 C15.1
  Top Signal Layer w0.2: v1(11,7.526) 11.026,7.5 11.241,7.5 11.582,7.159 11.582,6.976 11.719,6.84 R4.2 ; v1(11,9.5) 11.057,9.443 11.057,9.093 11.25,8.9 D44.2 ; C21.2 35.505,9.315 35.635,9.315 35.87,9.08 35.87,8.226 35.9,8.196 35.9,8.02 36.33,7.59 36.33,7.55
  Top Signal Layer w0.3: v1(7.25,2.55) USB.B1-A12 ; USB.A1-B12 v1(7.25,10.45) ; R2.2 9.496,2.494 9.496,3.266 C7.1 v1(10.19,3.29) ; C4.1 v1(10.214,5.91) 10.4,5.724 10.4,5.41 U3.9 U3.9@10.5,5.41 ; R4.2@11.719,6.84 11.632,6.754 11.632,6.432 11.56,6.36 U3.7 U3.6 ; R4.2 11.78,6.8 12.531,6.8 C5.2 ; R1.2 13.454,2.545 C6.2@14.14,2.545 ; v1(13.8,1.7) 13.8,1.754 14.14,2.094 14.14,2.4 C6.2 ; C244.1 20.08,10.46 C23.2 ; v1(20.12,9.32) 20.12,10.951 20.479,11.31 24.22,11.31 C26.1 24.3,12.24 C16.2 ; v1(21.72,3.72) 21.71,3.73 C25.1 C17.1 ; C24.1 21.83,7.55 22.32,7.55 v1(22.78,8.01) ; R17.2 v1@22.771,8.101 ; C26.1@24.28,11.33 C26.1@24.34,11.27 ; v1(29.58,0.425) C14.2 29.737,0.943 MD1.B1 MD1.B2 ; MD1.B3 MD1.B2 ; U7.22 30.55,4.86 U7.49 29.55,7.36 32.93,7.36 v1(32.94,7.37) ; MD1.A2 MD1.B2 ; C22.1@31.24,11.51 31.24,12.279 R10.2@31.241,12.28 ; C22.1 31.281,11.531 31.888,11.531 v1(31.908,11.552) ; C19.1@32.49,1.185 C18.2 v1(32.49,2.51) ; C19.1@32.625,1.185 O1.4@33.405,1.185 ; v1(33.6,12.35) 34.78,12.35 35.32,11.81 C15.1 ; D3.1 34.46,4.56 v1(34.45,4.55) 34.45,4.49 35.44,3.5 35.98,3.5 36.73,2.75 SW1.4 ; C20.1 35.31,9.51 C21.2 ; C27.2 35.645,6.87 36.025,7.25 36.03,7.25 36.33,7.55 37.15,7.55 37.45,7.85 37.45,8.81 38.47,9.83 SW1.5
  Bottom Signal Layer w0.2: v1@24.49,2.49 v1(24.49,2.511) v1(24.49,2.511) 24.51,2.51 24.51,2.65 25.4,3.54 C10.1 26.02,4.51 ; C9.1@26.2,5.22 26.05,5.37 U5.7 U5.6 ; U4.3 26.32,4.21 26.02,4.51 ; C9.1 26.38,4.87 26.02,4.51 ; U4.9 U4.8 28.077,2.227 28.49,2.64 28.7,2.64 C8.1 ; U4.5 28.371,3.752 28.455,3.669 ; 28.49,2.712 28.49,3.634 28.455,3.669 ; v1(32.49,2.51) 32.49,2.83 32.1,3.22 31.4,3.22 31.02,3.6 31.02,4.09 29.691,5.419 U2.4 U2.3 29.131,4.894 28.682,4.894 28.455,4.667 28.455,3.669
  Bottom Signal Layer w0.3: C2.1 9.65,3.91 9.61,3.87 9.61,3.48 9.762,3.328 10.152,3.328 v1(10.19,3.29) 11.784,3.29 11.96,3.114 U1.2 ; v1(11,7.526) 11.034,7.56 11.49,7.56 12.03,7.02 12.03,6.15 C3.1 C3.1@12.03,6.13 ; C1.1 13.5,0.69 13.8,0.99 v1(13.8,1.7) ; R11.2 30.14,10.959 30.881,10.959 31.14,10.7 ; Q1.2 31.14,10.7 ; v1(31.908,11.552) 31.908,11.497 31.446,11.035 31.446,11.006 31.14,10.7
  other v1: 17.72,3.72
Net10uh_1: 10uh.1 L2.1 | length 0.9
  Top Signal Layer w0.3: L2.1 35.315,7.775 10uh.1
Net10uh_2: 10uh.2 C27.1 U7.31 | length 3.1
  Top Signal Layer w0.15: U7.31@32.185,6.87 C27.1 34.45,6.88 10uh.2
Net*_2: *.2 R10.1 U7.39 | length 28
  Top Signal Layer w0.15: U7.39 30.55,10.59 30.855,10.895 31.04,10.895 31.07,10.925 31.704,10.925 31.709,10.93 32.2,10.93 32.51,11.24 32.51,11.829 R10.1
  Top Signal Layer w0.3: R10.1 v1(32.69,12.32)
  Mid Signal Layer w0.3: *.2@13.14,12.134 *.2 13.14,11.617 13.677,11.08 14.822,11.08 15.14,11.08 15.455,11.395 16.47,12.41 v1(21.37,12.41)
  Bottom Signal Layer w0.3: v1(21.37,12.41) 24.514,12.41 24.584,12.48 29.17,12.48 30.02,11.63 30.8,11.63 31.49,12.32 v1(32.69,12.32)
Net*_3: *.3 R9.1 U7.41 | length 22.6
  Top Signal Layer w0.15: v1(28.99,11.64) 28.99,11.649 29.041,11.7 29.19,11.551 R9.1 ; U7.41 29.55,10.625 29.621,10.696 29.621,11.11 29.55,11.181 29.55,11.391 R9.1@29.57,11.411
  Mid Signal Layer w0.3: *.3 11.74,11.27 12.405,10.605 15.645,10.605 16.87,11.83 22.08,11.83 22.73,12.48 28.02,12.48 28.86,11.64 v1(28.99,11.64)
Net*_4: *.5 D4.1 | length 14.4
  Top Signal Layer w0.3: v1(17.065,7.648) 17.027,7.61 17.027,7.038 17.022,7.034 17.022,6.785 17.427,6.38 D4.1
  Mid Signal Layer w0.3: *.5 8.94,10.79 9.58,10.15 12.24,10.15 14.08,8.31 16.403,8.31 v1(17.065,7.648)
NetANT2_1: ANT2.1 MD1.A1 | length 5.8
  Top Signal Layer w0.3: MD1.A1 30.93,0.913 30.93,0.595 31.135,0.39 32.885,0.39 33.925,0.39 33.93,0.395 33.935,0.39 34.975,0.39 35.18,0.595 35.18,0.6 35.61,1.03 ANT2.1
NetC2_2: C2.2 U1.4 | length 1.5
  Bottom Signal Layer w0.3: C2.2 10.86,4.82 11.01,4.67 U1.4
NetC5_1: C5.1 U3.5 | length 1.4
  Top Signal Layer w0.3: U3.5 12.56,6.085 13.031,6.085 13.271,6.325 13.271,6.6 13.431,6.76 C5.1
NetC7_2: C7.2 R3.1 U3.12 | length 5.4
  Top Signal Layer w0.2: R3.1 9.441,6.84 9.24,6.84 8.3,5.9 8.3,4.5 8.63,4.17 C7.2
  Top Signal Layer w0.3: C7.2 9.52,4.15 9.68,3.99 10.01,3.99 10.09,3.91 U3.12
NetC23_1: C23.1 O2.1 U7.2 | length 5.3
  Top Signal Layer w0.3: C23.1@21.03,10.48 21.06,10.45 22.97,10.45 O2.1 23.825,10.46 24.8,9.485 24.8,9.065 25.005,8.86 U7.2
NetC24_2: C24.2 O2.2 U7.3 | length 4.1
  Top Signal Layer w0.3: C24.2 21.82,8.62 O2.2@23.13,8.62 ; O2.2 24.15,8.96 24.75,8.36 U7.3
NetC25_2: C25.2 D4.2 R19.1 U7.7 | length 7.3
  Top Signal Layer w0.15: R19.1 20.13,6.355 20.135,6.36 21.69,6.36 ; C25.2 21.71,6.34 21.69,6.36 ; 24.78,6.36 21.69,6.36
  Top Signal Layer w0.3: 24.78,6.36 U7.7
NetC244_2: C244.2 IC22.C8 R542.1 U7.17 | length 22.5
  Top Signal Layer w0.2: v1(17.72,9.32) 16.18,7.78 16.18,6.07 16.81,5.44 16.81,3.3 19.125,0.985 26.405,0.985 28.05,2.63 28.05,2.81 U7.17
  Top Signal Layer w0.3: R542.1 17.72,8.361 v1(17.72,9.32) 17.75,9.35 C244.2
NetD1_1: D1.1 U3.3 U7.19 | length 20.5
  Top Signal Layer w0.15: 15.91,3.42 15.91,3.175 16.077,3.007 18.775,0.31 26.684,0.31 28.725,2.351 28.975,2.601 28.975,3.16 U7.19
  Top Signal Layer w0.2: v1(14.98,5.2) 15.47,5.2 15.91,4.76 15.91,3.42
  Top Signal Layer w0.3: U3.3 13.53,4.91 13.82,5.2 14.28,5.2 D1.1 14.295,5.205 14.975,5.205 v1(14.98,5.2)
NetD1_2: D1.2 R6.2 | length 0.8
  Top Signal Layer w0.3: D1.2 14.296,4.304 15.124,4.304 R6.2
NetD2_1: D2.1 U3.4 U7.18 | length 20.5
  Top Signal Layer w0.15: 16.33,3.25 18.945,0.635 26.55,0.635 28.4,2.485 28.4,2.52 28.55,2.67 U7.18
  Top Signal Layer w0.2: v1(14.98,5.9) 15.56,5.9 16.33,5.13 16.33,3.25
  Top Signal Layer w0.3: U3.4 13.235,5.41 13.235,5.615 13.55,5.93 D2.1 14.315,5.915 14.965,5.915 v1(14.98,5.9)
NetD2_2: D2.2 R5.2 | length 0.8
  Top Signal Layer w0.3: R5.2 D2.2 D2.2@14.304,6.834
NetD3_2: D3.2 R14.2 | length 1.3
  Top Signal Layer w0.3: R14.2 34.545,6.004 34.771,6.004 35.26,5.515 35.26,5.37 D3.2
NetD5_2: D5.2 Q1.3 V.1 | length 12.1
  Bottom Signal Layer w0.3: D5.2 28.941,9.765 29.091,9.614 29.091,8.604 29.129,8.566 29.129,8.343 29.553,7.919 29.776,7.919 30.545,7.15 31.735,7.15 31.94,7.355 31.94,7.65 Q1.3 33.76,8.85 34.14,9.23 34.14,11.6 34.64,12.1 V.1
NetD44_1: D44.1 U7.37 | length 41
  Top Signal Layer w0.2: U7.37 v1(32.105,9.985)
  Top Signal Layer w0.3: D44.1 v1(13.35,7.95)
  Mid Signal Layer w0.3: v1(13.35,7.95) 13.75,7.55 16.35,7.55 17.035,6.865 18.915,6.865 24.585,6.865 30.02,1.43 34.42,1.43 36.74,3.75 36.74,8.68 33.645,11.775 32.958,11.775 32.928,11.745 32.915,11.745 32.525,11.355 32.105,10.935 v1(32.105,9.985)
NetD44_3: D44.3 U7.38 | length 39.2
  Top Signal Layer w0.2: U7.38 31.05,10.41 31.215,10.575 31.849,10.575 31.854,10.58 v1(32.68,10.58)
  Top Signal Layer w0.3: D44.3 12.155,9.845 13.358,9.845 v1(13.363,9.84)
  Mid Signal Layer w0.3: v1(13.363,9.84) 13.366,9.837 14.36,9.837 15.412,8.785 16.741,8.785 18.186,7.34 25.07,7.34 30.505,1.905 33.905,1.905 36.25,4.25 36.25,8.498 34.185,10.563 32.697,10.563 v1(32.68,10.58)
NetD44_4: D44.4 USB.A6 | length 4.9
  Top Signal Layer w0.2: USB.A6 8.063,6.724 8.3,6.961 8.3,7.58 8.875,8.155 8.875,9.249 9.126,9.5 9.2,9.5 9.55,9.85 D44.4
NetD44_6: D44.6 USB.A7 | length 3.7
  Top Signal Layer w0.2: USB.A7 8.093,6.223 8.675,6.805 8.675,7.424 9.001,7.75 9.65,7.75 D44.6
NetIC22_C3: IC22.C3 U7.29 | length 16.3
  Top Signal Layer w0.3: U7.29 32.83,5.86 33.72,4.97 v1(33.72,4.545)
  Mid Signal Layer w0.2: v1(21.72,9.32) 22.481,8.559 23.195,8.559 23.966,8.559 25.522,8.559 28.341,5.74 32.366,5.74 33.561,4.545 v1(33.72,4.545)
NetIC22_C4: IC22.C4 U7.43 | length 10.1
  Top Signal Layer w0.3: U7.43 v1(28.55,10.543)
  Mid Signal Layer w0.3: v1(20.92,9.32) 20.92,9.79 21.2,10.07 21.96,10.07 22.83,9.2 27.98,9.2 28.55,9.77 v1(28.55,10.543)
NetIC22_C6: IC22.C6 U7.44 | length 12.2
  Top Signal Layer w0.15: U7.44 v1(28.05,10.997)
  Mid Signal Layer w0.15: v1(19.31,9.32) 19.31,9.97 19.81,10.47 22.126,10.47 22.996,9.6 27.81,9.6 28.05,9.84 v1(28.05,10.997)
  Bottom Signal Layer w0.3: v1(19.31,9.32) IC22.C6
NetIC22_C7: IC22.C7 U7.45 | length 11.4
  Top Signal Layer w0.3: U7.45 27.55,10.35 27.55,10.405 27.553,10.407 27.55,10.41 v1(27.55,10.543)
  Mid Signal Layer w0.2: v1(18.52,9.32) 18.52,10.06 19.28,10.82 22.49,10.82 23.36,9.95 27.238,9.95 27.58,10.292 27.58,10.38 27.55,10.41 v1(27.55,10.543)
NetIC22_D4: IC22.D4 U7.5 | length 5.9
  Top Signal Layer w0.15: 20.91,7.48 20.91,7.45 21.145,7.215 21.145,7.206 21.306,7.045 21.465,7.045 21.471,7.039 24.064,7.039 24.386,7.36 24.74,7.36
  Top Signal Layer w0.3: 20.91,7.48 20.91,7.727 v1(20.91,8.52) ; 24.74,7.36 U7.5
  Bottom Signal Layer w0.3: v1(20.91,8.52) IC22.D4
NetIC22_D5: IC22.D5 U7.6 | length 6.7
  Top Signal Layer w0.15: 20.13,7.49 20.93,6.69 24.175,6.69 24.345,6.86 24.74,6.86
  Top Signal Layer w0.3: v1(20.12,8.52) 20.13,8.51 20.13,7.49 ; 24.74,6.86 U7.6
NetIC22_H4: IC22.H4 U7.9 | length 4.6
  Top Signal Layer w0.3: v1(24.2,5.426) 24.238,5.464 24.416,5.464 24.448,5.496 24.584,5.36 U7.9
  Mid Signal Layer w0.3: v1(20.92,5.32) 24.04,5.32 24.146,5.426 v1(24.2,5.426)
NetIC22_J4: IC22.J4 U7.10 | length 4.6
  Top Signal Layer w0.3: v1(24.212,4.751) 24.266,4.751 24.375,4.86 U7.10
  Mid Signal Layer w0.3: v1(20.92,4.52) 23.927,4.52 24.158,4.751 v1(24.212,4.751)
NetIC22_J7: IC22.J7 U7.14 | length 13.5
  Top Signal Layer w0.3: v1(25.539,2.26) 25.577,2.298 26.033,2.298 26.55,2.815 U7.14
  Mid Signal Layer w0.3: v1(18.52,4.53) 18.52,4.96 19.76,6.2 24.239,6.2 25.89,4.549 25.89,2.65 26.042,2.498 25.695,2.15 25.649,2.15 v1(25.539,2.26)
  Bottom Signal Layer w0.3: IC22.J7 v1(18.52,4.53)
NetIC22_J8: IC22.J8 U7.16 | length 13.7
  Top Signal Layer w0.2: v1(17.72,4.53) 17.185,3.995 17.185,3.455 19.28,1.36 26.249,1.36 27.55,2.661 U7.16
  Bottom Signal Layer w0.3: IC22.J8 v1(17.72,4.53)
NetIC22_K4: IC22.K4 U7.11 | length 5.2
  Top Signal Layer w0.2: v1(20.92,3.72) 21.445,3.195 21.937,3.195 21.952,3.21 23.35,3.21 24.366,4.226 24.429,4.226 24.563,4.36 U7.11
  Top Signal Layer w0.3: v1@20.92,3.707 v1(20.92,3.72)
NetIC22_K5: IC22.K5 U7.12 | length 6.2
  Top Signal Layer w0.2: v1(20.12,3.72) 20.885,2.955 21.155,2.955 21.29,2.82 22.093,2.82 22.108,2.835 23.505,2.835 24.521,3.851 24.585,3.851 24.594,3.86 U7.12
  Top Signal Layer w0.3: v1@20.12,3.666 v1(20.12,3.72)
NetIC22_K6: IC22.K6 U7.13 | length 7.6
  Top Signal Layer w0.2: v1(19.31,3.73) 19.741,3.299 20.46,2.58 20.62,2.42 23.621,2.42 24.436,3.235 U7.13
  Top Signal Layer w0.3: v1@19.31,3.717 v1(19.31,3.73)
  Bottom Signal Layer w0.3: v1(19.31,3.73) IC22.K6
NetIC22_K7: IC22.K7 U7.15 | length 10.4
  Top Signal Layer w0.2: v1(18.51,3.72) 18.51,3.595 20.37,1.735 24.056,1.735 25.305,1.735 26.094,1.735 27.05,2.691 U7.15
  Bottom Signal Layer w0.3: v1(18.51,3.72) IC22.K7
NetL2_2: L2.2 U7.33 | length 2.6
  Top Signal Layer w0.15: U7.33 32.723,7.86 32.733,7.87 33.5,7.87 34.27,8.64 L2.2
NetL3_2: L3.2 U7.8 | length 3.2
  Top Signal Layer w0.15: L3.2 22.75,5.91 22.875,6.035 24.475,6.035 24.65,5.86 24.82,5.86
  Top Signal Layer w0.3: 24.82,5.86 U7.8
NetMD1_A3: MD1.A3 U7.21 | length 1.7
  Top Signal Layer w0.2: U7.21 30.05,2.776 30.259,2.567 30.45,2.567 30.674,2.567 30.85,2.391 30.85,2.167 MD1.A3
NetO1_1: O1.1 U7.25 | length 5.6
  Top Signal Layer w0.3: U7.25 33.087,3.86 33.198,3.972 33.675,3.972 33.786,3.86 34.14,3.86 34.71,3.29 34.975,3.29 35.18,3.085 35.18,2.82 35.18,1.89 34.975,1.685 O1.1
NetO1_3: O1.3 U7.24 | length 2.2
  Top Signal Layer w0.3: U7.24 32.785,3.235 O1.3@33.485,2.535
NetQ1_1: Q1.1 R11.1 R12.1 | length 4.1
  Bottom Signal Layer w0.2: R11.1 30.08,9.669 R12.1 29.68,9.659 29.541,9.52 29.541,9.34 29.516,9.315 29.516,8.78 29.554,8.742 29.554,8.519 29.73,8.344 30.451,8.344 30.477,8.37 30.67,8.37 Q1.1
NetR1_1: R1.1 U3.15 | length 1.3
  Top Signal Layer w0.3: U3.15 12.06,2.676 12.236,2.5 12.611,2.5 R1.1
NetR2_1: R2.1 U3.13 U7.42 | length 28.9
  Top Signal Layer w0.15: U7.42 29.086,10.021 29.086,10.867 v1(29.121,10.903)
  Top Signal Layer w0.3: v1(9.68,1.784) 9.68,1.884 9.874,1.884 9.89,1.9 9.96,1.9 10.229,2.169 R2.1 10.77,2.47 11.06,2.76 U3.13
  Mid Signal Layer w0.15: 26.415,11.405 26.772,11.405 26.776,11.409 27.19,11.409 27.194,11.405 27.751,11.405 27.843,11.497 28.257,11.497 28.614,11.14 28.884,11.14 v1(29.121,10.903)
  Mid Signal Layer w0.2: v1(9.68,1.784) 11.4,3.504 11.4,4.29 13.951,6.841 v1(15.05,6.841) ; v1(15.65,9.36) 17.695,11.405 26.415,11.405
  Bottom Signal Layer w0.15: v1@15.05,6.821 v1(15.05,6.841)
  Bottom Signal Layer w0.2: v1(15.05,6.841) 15.05,6.87 15.65,7.47 v1(15.65,9.36)
NetR3_2: R3.2 R4.1 U3.8 | length 1.6
  Top Signal Layer w0.3: R3.2 R4.1 11.06,6.763 U3.8
NetR8_1: R8.1 USB.A5 | length 4
  Top Signal Layer w0.2: USB.A5 7.279,7.753 7.943,7.753 8.5,8.31 8.5,9.405 8.95,9.855 8.95,10.501 R8.1
NetR12_2: R12.2 U7.36 | length 4.1
  Top Signal Layer w0.3: U7.36 32.56,9.36 v1(32.93,9.73)
  Bottom Signal Layer w0.3: R12.2 31.931,8.901 32.34,9.31 32.34,9.395 32.545,9.6 32.7,9.6 32.83,9.73 v1(32.93,9.73)
NetR14_1: R14.1 U7.30 | length 1.6
  Top Signal Layer w0.3: U7.30 33.431,6.36 R14.1
NetR15_1: R15.1 U2.6 U4.2 U5.13 U7.46 | length 38.5
  Top Signal Layer w0.15: v1(26.983,10.909) 27.017,10.876 27.017,10.018 U7.46 ; v1@27.05,10.94 27.05,11.02 27.299,11.269 27.615,11.269 28.101,11.755 R15.1
  Bottom Signal Layer w0.2: 24.809,1.391 23.96,2.24 23.96,3.61 23.09,4.48 23.09,6.34 24.175,7.425 24.175,7.717 24.274,7.816 24.274,11.024 24.57,11.32 25.36,11.32 25.77,10.91 ; U4.2 25.995,3.24 25.97,3.215 25.746,3.215 25.015,2.484 25.015,2.479 25.014,2.477 25.014,2.272 24.839,2.097 24.839,1.421 24.919,1.341 24.889,1.311 25.25,0.95 31.95,0.95 35.01,4.01 35.01,5.06 34.82,5.25 32.944,5.25 32.638,4.943 32.079,4.943 U2.6 ; U5.13@26.54,8.443 26.54,9.741 26.091,10.189 25.77,10.511 25.77,10.91 ; v1(26.983,10.909) 26.983,10.99 26.713,11.26 26.713,11.36 26.22,11.36 25.77,10.91
NetR16_1: R16.1 U2.5 U4.4 U5.14 U7.47 | length 16.8
  Top Signal Layer w0.15: v1(26.317,10.707) 26.317,12.295 R16.1
  Top Signal Layer w0.3: v1(26.317,10.707) 26.307,10.697 26.307,10.66 26.34,10.66 26.55,10.45 U7.47
  Bottom Signal Layer w0.2: v1(26.317,10.707) 26.27,10.66 26.46,10.47 26.65,10.47 27.04,10.08 27.04,9.04 ; U4.4 26.82,4.03 26.845,4.055 26.845,4.064 27.021,4.24 27.03,4.24 27.16,4.37 27.584,4.37 28.144,4.93 28.188,4.93 28.206,4.948 ; U5.14@27.04,8.443 27.04,9.04 ; 28.184,4.97 28.455,5.241 28.455,5.668 28.631,5.844 28.968,5.844 29.706,6.581 ; U2.5 31.251,5.419 30.089,6.581 29.706,6.581 ; 27.04,9.04 28.054,9.04 28.704,8.39 28.704,8.167 29.377,7.494 29.6,7.494 29.706,7.388 29.706,6.581
NetR17_1: R17.1 SW1.2 U7.4 | length 19.2
  Top Signal Layer w0.15: v1(35.59,4.46) 36.23,5.1
  Top Signal Layer w0.3: v1(23.53,8.01) 23.636,7.904 23.636,7.636 23.55,7.55 R17.1 24.01,7.55 24.32,7.86 U7.4 ; 36.23,5.1 36.57,5.44 SW1.2
  Mid Signal Layer w0.3: v1(23.53,8.01) 25.47,8.01 29.598,3.882 33.108,3.882 33.198,3.972 33.675,3.972 33.786,3.86 34.22,3.86 34.335,3.975 34.688,3.975 35.025,4.312 35.025,4.46 v1(35.59,4.46)
NetU2_7: U2.7 U7.28 | length 2.3
  Top Signal Layer w0.3: U7.28 32.595,5.36 32.8,5.155 32.8,4.73 32.862,4.668 32.862,4.501 v1(32.9,4.463)
  Bottom Signal Layer w0.2: U2.7 32.076,4.441 32.878,4.441 v1(32.9,4.463)
NetU3_14: U3.14
VBAT: BAT.2 C1.2 C4.2 U1.1 U1.3 U3.10 U3.11 | length 10.8
  Top Signal Layer w0.3: v1(8.83,5.03) C4.2 9.64,4.91 U3.10 U3.11
  Bottom Signal Layer w0.3: v1(8.83,5.03) 8.83,3.588 10.138,2.28 U1.3 11.03,2.26 11.03,1.34 11.62,0.75 C1.2@11.99,0.75 ; C1.2 12.04,1.07 12.3,1.33 12.405,1.33 12.425,1.35 12.84,1.35 12.91,1.42 U1.1 U1.1@12.915,2.275
VUSB: C6.1 D44.5 R5.1 R6.1 R8.2 U3.1 U3.2 USB.A4-B9 USB.B4-A9 | length 11.7
  Top Signal Layer w0.2: USB.B4-A9 7.303,4.021 7.979,4.021 8.5,3.5 8.5,2.5 v1(7.5,1.5) ; USB.A4-B9 7.979,8.875 8.096,8.992 8.096,9.662 8.289,9.855 v1(8.289,9.936) ; D44.5 10.7,8.9 11,8.6 v1(11,8.201)
  Top Signal Layer w0.3: v1(8.289,9.936) 8.3,9.947 8.3,10.609 R8.2 R8.2@8.306,10.625 ; U3.2 U3.1 13.389,3.91 13.622,3.677 13.622,3.478 v1(13.66,3.44) C6.1 14.351,3.491 15.079,3.491 R6.1 ; v1(14.3,9) R5.1 R5.1@14.305,8.404
pads on no net: ANT2.2 IC22.A1 IC22.A2 IC22.A9 IC22.A10 IC22.B1 IC22.B9 IC22.B10 IC22.D3 IC22.D6 IC22.D7 IC22.D8 IC22.E3 IC22.E4 IC22.E5 IC22.E6 IC22.E7 IC22.E8 IC22.F3 IC22.F4 IC22.F5 IC22.F6 IC22.F7 IC22.F8 IC22.G3 IC22.G4 IC22.G5 IC22.G6 IC22.G7 IC22.G8 IC22.H3 IC22.H5 IC22.H6 IC22.H7 IC22.J3 IC22.J5 IC22.L1 IC22.L2 IC22.L9 IC22.L10 IC22.M1 IC22.M2 IC22.M9 IC22.M10 SW1. SW1.1 U3.16 U3.17 U4.7 U5.2 U5.3 U5.4 U5.9 U5.10 U5.11 U7.26 U7.27 USB.A8 USB.B5 USB.B6 USB.B7 USB.B8 V.3

## Polygon pours and split planes (outlines as drawn)
VUSB on PWR "VUSB_L03_P005" (solid, pour order 5): 8.5,6.5 6.5,6.5 6.5,2 0,2 0,0 8.5,0
+3.3 on PWR "+3.3_L03_P014" (solid, pour order 14): 12,0 12,3.02 15.98,3.02 16,3 16,13 40,13 40,4.07 34.5,4.07 34.5,0
VUSB on PWR "VUSB_L03_P001" (solid, pour order 1): 6.5,6 16,6 16,10.4 6.5,10.4
VUSB on PWR "VUSB_L03_P002" (solid, pour order 2): 16,7 16,3 12,3 12,7
VBAT on PWR "VBAT_L03_P004" (solid, pour order 4): 12.204,0 8.5,0 8.5,6 12.2,6
+3.3 on PWR "+3.3_L03_P011" (solid, pour order 11): 6.5,10.4 6.5,10.95 0,10.95 0,13 16,13 16,10.4
GND on GND_2 "GND_L05_P015" (solid, pour order 15): 6.5,11 0,11 0,13 40,13 40,4.07 34.5,4.07 34.5,0 0,0 0,2 6.5,2
GND on GND_1 "GND_L02_P013" (solid, pour order 13): 0,0 0,2 6.5,2 6.5,10.95 0,10.95 0,13 40,13 40,4.07 34.5,4.07 34.5,0

## Text inside footprints (layer, text, board x,y; h text height)
D5: Bottom Overlay "*" at 23.982,10.4 h1.27 r180; Bottom 3D Body "*" at 25.472,10.4 h1.27 r180
USB: Top 3D Body "*" at 6.615,12.532 h1.27 r270; Top Overlay "*" at 6.66,14.79 h1.27 r270